# EAGLE board supply_Fachrur Rozi (EAGLE 7.6.0)
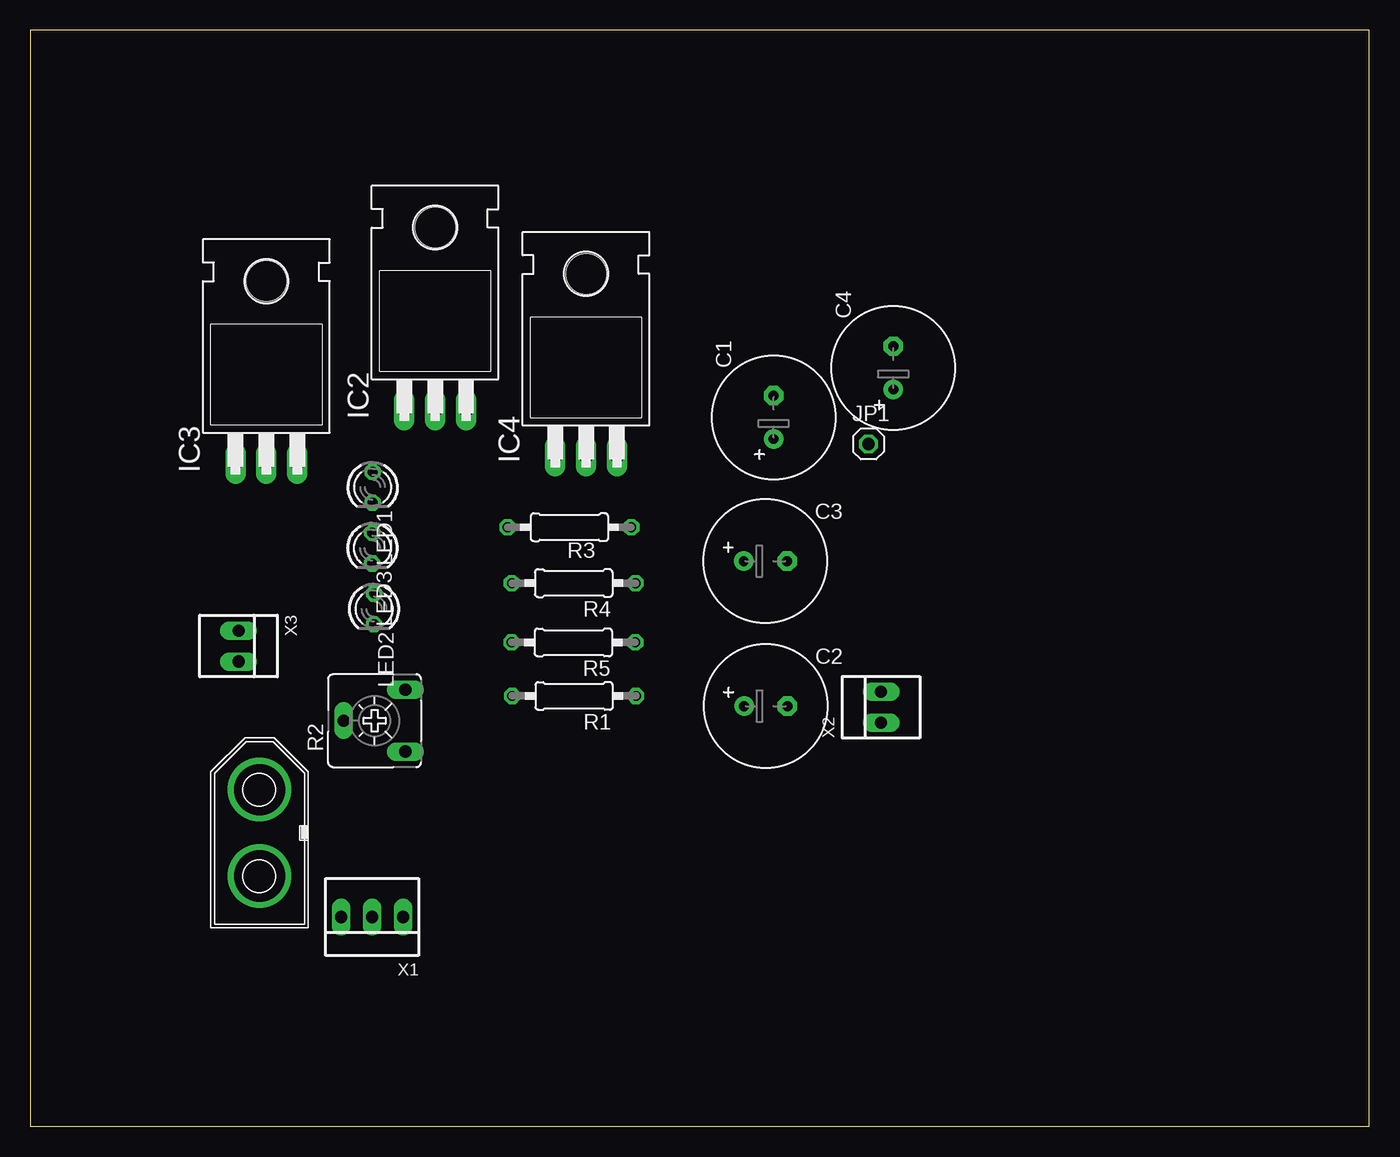
[diagram p0: board, top side]
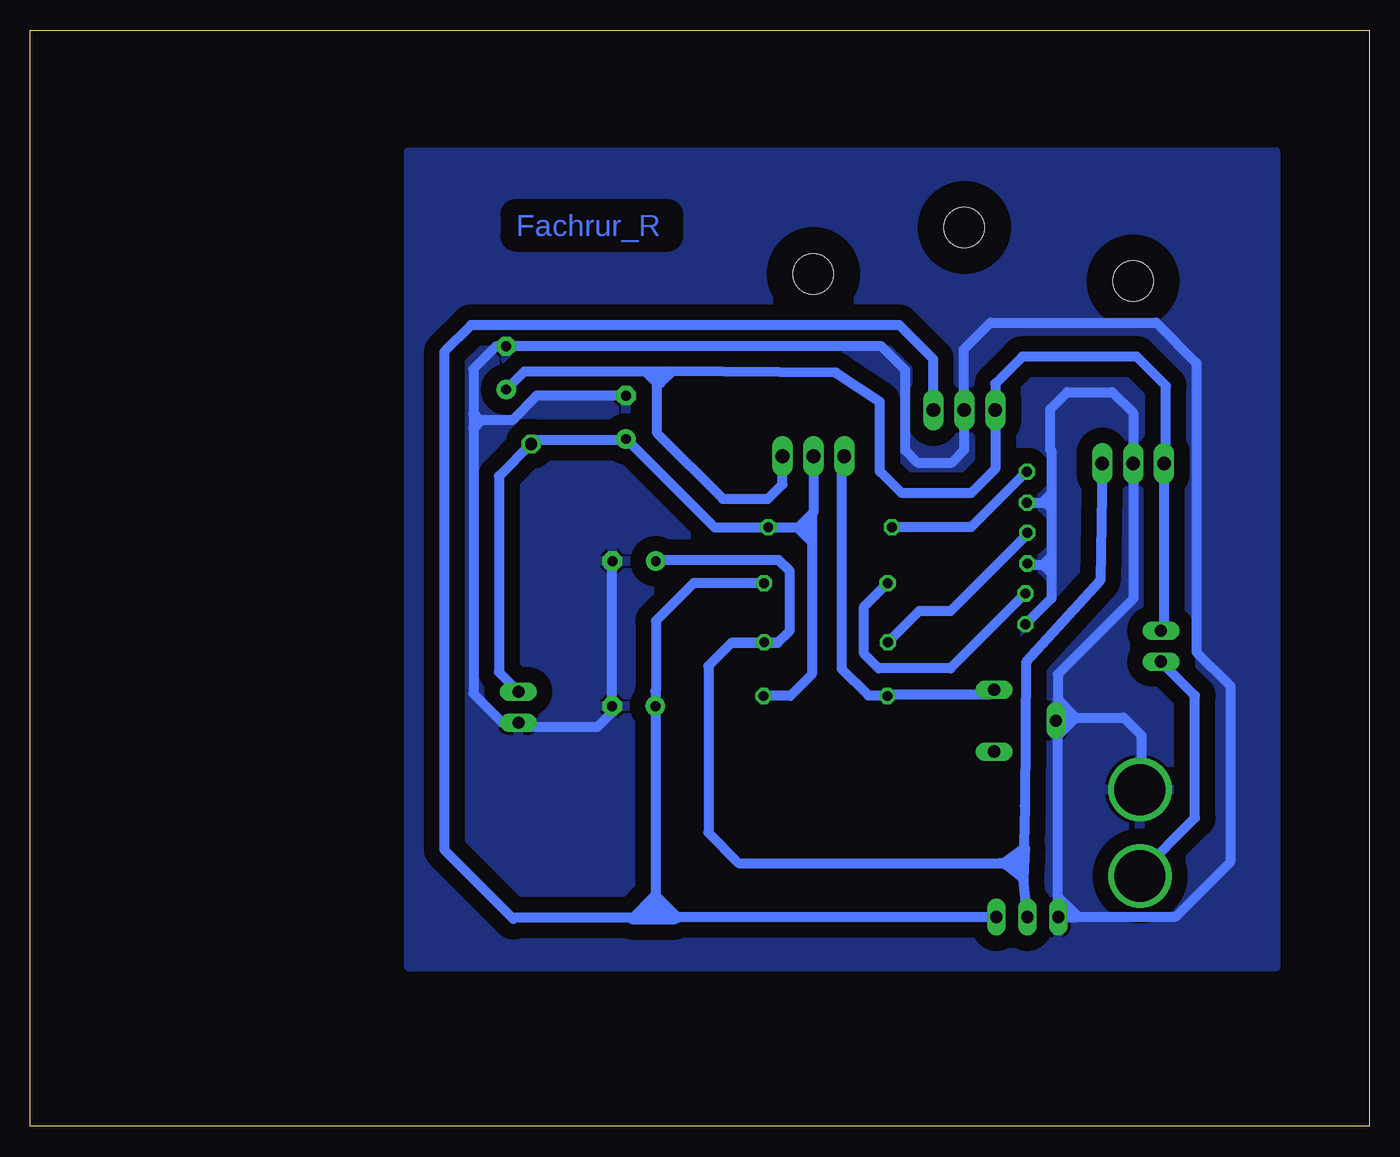
[diagram p1: board, bottom side, seen from below]

Size 110 x 90 mm. Coordinates in mm from the lower left corner, seen from the top.
Outline: 0,0 110,0 110,90 0,90 0,0
Copper layers (1*16): Top 0.035mm / dielectric 1.5mm / Bottom 0.035mm
Design rules "default": minimum track width 6mil, minimum drill 0.35mm, track to track 6mil, track to pad 6mil, pad to pad 6mil, via to via 6mil, smd to smd 6mil, copper to edge 40mil, drill to drill 6mil, minimum pad ring 10mil, minimum via ring 8mil, stop-mask expansion 4mil, vias tented up to drill 0mil, thermal gap 10mil

## Footprints (pad centres in the part's own frame; a part is rotated, then mirrored left to right if it is on the bottom)
E3,5-10 = drill 0.813 pad 1.6: + -1.778,0 | drill 0.813 pad 1.6 octagon: - 1.778,0
TO220H = drill 1.118 long: 1 -2.54,-10.16; 2 0,-10.16; 3 2.54,-10.16 | hole 3.302: 0,4.826
1X01 = drill 1.016 octagon: 1 0,0
LED3MM = drill 0.813 octagon: A -1.27,0; K 1.27,0
0207/10 = drill 0.813 octagon: 1 -5.08,0; 2 5.08,0
CA6V = drill 1.016 long: A -2.54,-2.54; E 2.54,-2.54; S 0,2.54
CON-XT60M = drill 4.2: V+ -3.55,0; V- 3.55,0
22-23-2031 = drill 1 long: 1 -2.54,0; 2 0,0; 3 2.54,0
22-23-2021 = drill 1 long: 1 -1.27,0; 2 1.27,0

## Placement (x,y rotation side)
C1  1000uF/16V  [E3,5-10]  61.06,58.22 90 top
C2  1000uF/16V  [E3,5-10]  60.42,34.5 0 top
C3  1000uF/16V  [E3,5-10]  60.39,46.4 0 top
C4  1000uF/16V  [E3,5-10]  70.9,62.28 90 top
IC2  7805T  [TO220H]  33.26,68.98 0 top
IC3  7805T  [TO220H]  19.39,64.58 0 top
IC4  317T  [TO220H]  45.66,65.18 0 top
JP1  [1X01]  68.86,56.04 0 top
LED1  [LED3MM]  28.11,52.48 270 top
LED2  [LED3MM]  28.23,42.48 270 top
LED3  [LED3MM]  28.09,47.48 270 top
R1  1K2  [0207/10]  44.67,35.33 180 top
R2  20K  [CA6V]  28.28,33.3 90 top
R3  1K  [0207/10]  44.29,49.19 180 top
R4  1K  [0207/10]  44.64,44.6 180 top
R5  1K  [0207/10]  44.62,39.73 180 top
VIN  [CON-XT60M]  18.83,24.09 90 top
X1  VSYS  [22-23-2031]  28.08,17.17 180 top
X2  VMOT  [22-23-2021]  69.9,34.41 90 top
X3  switch  [22-23-2021]  17.1,39.43 270 top

## Library data of the parts
C1-C4 R1 R3-R5 = rcl
IC2-IC4 = linear
JP1 = pinhead
LED1-LED3 = led
R2 = pot
VIN = con-XT60M
X1 = con-molex; MF: MOLEX; MPN: 22-23-2031; OC_FARNELL: 1462950; OC_NEWARK: 30C0862
X2 X3 = con-molex; MF: MOLEX; MPN: 22-23-2021; OC_FARNELL: 1462926; OC_NEWARK: 25C3832

## Nets
+12V: C3.+ IC3.3 R5.1 X1.2
GND: C1.- C2.- C3.- C4.- IC2.2 IC3.2 LED1.K LED2.K LED3.K R2.S VIN.V- X1.3 X2.1
N$1: IC4.1 R1.2 R2.E
N$2: LED1.A R3.2
N$3: LED3.A R5.2
N$4: VIN.V+ X3.2
N$5: LED2.A R4.2
VCC: C2.+ IC2.3 R4.1 X1.1
VDD: C1.+ IC4.2 JP1.1 R1.1 R3.1 X2.2
VPP: C4.+ IC2.1 IC3.1 IC4.3 X3.1

## Tracks (layer width: path | path; a pad name or v marks a point on that pad's centre or on a via)
+12V
  Bottom 0.813: 58.39,46.62 C3.+ 58.51,46.5 48.5,46.5 47.6,45.6 47.6,40.7 48.6,39.7 52.4,39.7 | 48.85,39.73 R5.1 52.4,39.7 | IC3.3 22.1,44.8 28.2,38.1 28.3,26.3 28.4,21.6 29.9,21.7 28.3,22.9 28.4,20.3 | 28.4,20.3 29.9,21.5 28.9,21.4 28.4,21.1 30.3,21.6 51.8,21.6 54.3,24.1 54.3,37.8 52.4,39.7 | X1.2 28.4,20.3
GND
  Bottom 0.813: 62.53,46.04 C3.- | IC3.2 19.5,54.31 | 26.1,51.99 26.88,51.21 LED1.K 26.61,51.21 26.1,50.7 | 26.1,51.99 26.1,55.44 26.2,55.54 26.2,58.9 24.8,60.3 21.1,60.3 19.39,58.59 IC3.2 | IC3.2 19.39,43.3 25.59,37.1 25.59,35.07 | 24.08,33.56 25.48,33.56 | 25.48,33.56 25.59,33.56 25.59,35.07 | 25.48,33.56 R2.S 25.63,33.19 25.63,32.01 | 24.08,33.56 25.59,35.07 | 25.63,32.01 25.63,17.26 X1.3 24.03,17.17 24,17.2 24,17.3 25.6,18.9 25.6,18 25.1,17.5 24.6,17.5 24.3,17.2 15.9,17.2 11.42,21.68 11.42,36.18 14.18,38.94 14.18,62.68 17.5,66 31.1,66 33.3,63.8 33.3,59.48 33.26,59.44 IC2.2 33.26,55.54 34.3,54.5 37.1,54.5 38.1,55.5 38.1,62.1 40.06,64.06 C4.- | 24.08,33.56 25.63,32.01 | 62.17,45.73 C3.- | C3.- 62.2,46.37 C2.- 62.2,34 63.4,32.8 69.56,32.8 X2.1 | C3.- 62.17,46.65 | 71.21,33.14 73.6,35.53 73.6,57.3 | 26.1,50.7 26.1,46.8 | 26.1,46.8 26.1,46.1 | 26.1,46.1 26.8,46.1 | 26.8,46.1 27.98,46.1 LED3.K | 26.1,46.1 26.1,45.4 | 26.1,45.4 26.1,43.34 LED2.K | 26.1,51.99 26.1,50.7 | 26.1,46.8 26.8,46.1 | 26.8,46.1 26.1,45.4 | C4.- 71.74,64.06 73.6,62.2 73.6,58.5 | C1.- 68.4,60 70.4,58 73.1,58 73.6,58.5 | 73.6,58.5 73.6,57.3 | 73,57.9 73.6,57.3 | 70.84,64 C4.- | 24.08,33.56 20.16,33.56 18.7,32.1 18.7,27.77 VIN.V-
  Bottom 1.016: 70.86,64.1 C4.-
  pour Bottom (isolate 1.27): 7.7,80 7.7,13.1 78.9,13.1 78.9,80
N$1
  Bottom 0.813: R2.E 31.2,35.46 39.46,35.46 R1.2 39.63,35.37 41.15,35.37 43.34,37.56 43.34,54.8 IC4.1
N$2
  Bottom 0.813: LED1.A 28.15,53.75 32.7,49.2 R3.2
N$3
  Bottom 0.813: LED3.A 28.09,48.61 34.4,42.3 36.97,42.3 R5.2
N$4
  Bottom 0.813: VIN.V+ 18.83,20.78 14.3,25.31 14.3,35.36 X3.2
N$5
  Bottom 0.813: LED2.A 28.25,43.75 34.4,37.6 40.3,37.6 41.5,38.8 41.5,42.66 R4.2
VCC
  Bottom 0.813: R4.1 55.5,44.6 58.6,41.5 58.6,35.79 58.64,35.75 C2.+ 58.64,18.94 | IC2.3 35.8,63 38.6,65.8 73.8,65.8 76,63.6 76,22.7 70.3,17 70.2,17.1 58.4,17.1 58.6,17.3 58.6,17.6 59.4,17.6 58.9,18.1 58.8,18.1 57.9,17.2 56.8,17.2 57,17 60.6,17 58.66,18.94 58.64,18.94 | X1.1 56.73,17.17 56.8,17.1 58.64,18.94
VDD
  Bottom 0.813: 45.76,50.3 45.76,49.19 47,49.19 | R3.1 47,49.19 | 45.6,55.08 IC4.2 45.66,50.4 45.76,50.3 | R3.1 49.35,49.17 46.89,49.17 | 46.89,49.17 45.78,49.17 45.78,47.97 | 45.78,47.97 45.78,37.1 47.55,35.33 R1.1 | 49.39,49.17 53.79,49.17 C1.+ 61.14,56.36 68.54,56.36 JP1.1 71.5,53.4 71.5,37.28 X2.2 | 49.39,49.17 R3.1 | 49.4,49.18 49.39,49.17 | 45.76,50.3 46.89,49.17 | 47,49.19 45.78,47.97
VPP
  Bottom 0.813: X3.1 16.85,40.95 IC3.1 16.7,54.57 16.7,60.8 19.1,63.2 28.5,63.2 30.72,60.98 IC2.1 30.72,53.98 32.7,52 38.4,52 40.1,53.7 arc90 40.2,53.8 40.2,59.5 43.8,61.9 57.7,62 | 58.5,61 58.5,56.92 53.1,51.52 49.4,51.52 48.2,52.72 IC4.3 | C4.+ 69.4,62 59.5,62 | 59.5,62 58.3,62 | 58.3,62 57.7,62 | 57.7,62 57.25,62 58.25,61 58.5,61 | 58.5,61 | 58.5,61 59.5,62 | 58.3,62 58.3,61.2 58.5,61

## Text on the board
Bottom: Fachrur_R